# Altium PCB PCB.PcbDoc
Units mm, origin at the board's own origin, x right, y up, seen from the top; angles counter-clockwise.
Board outline 38.61 x 38.61 mm, 4 copper layers (Top Layer, Signal Layer 1, Signal Layer 2, Bottom Layer), stack 1.54 mm thick; 19 components, 86 nets, 246 pads, 116 vias.
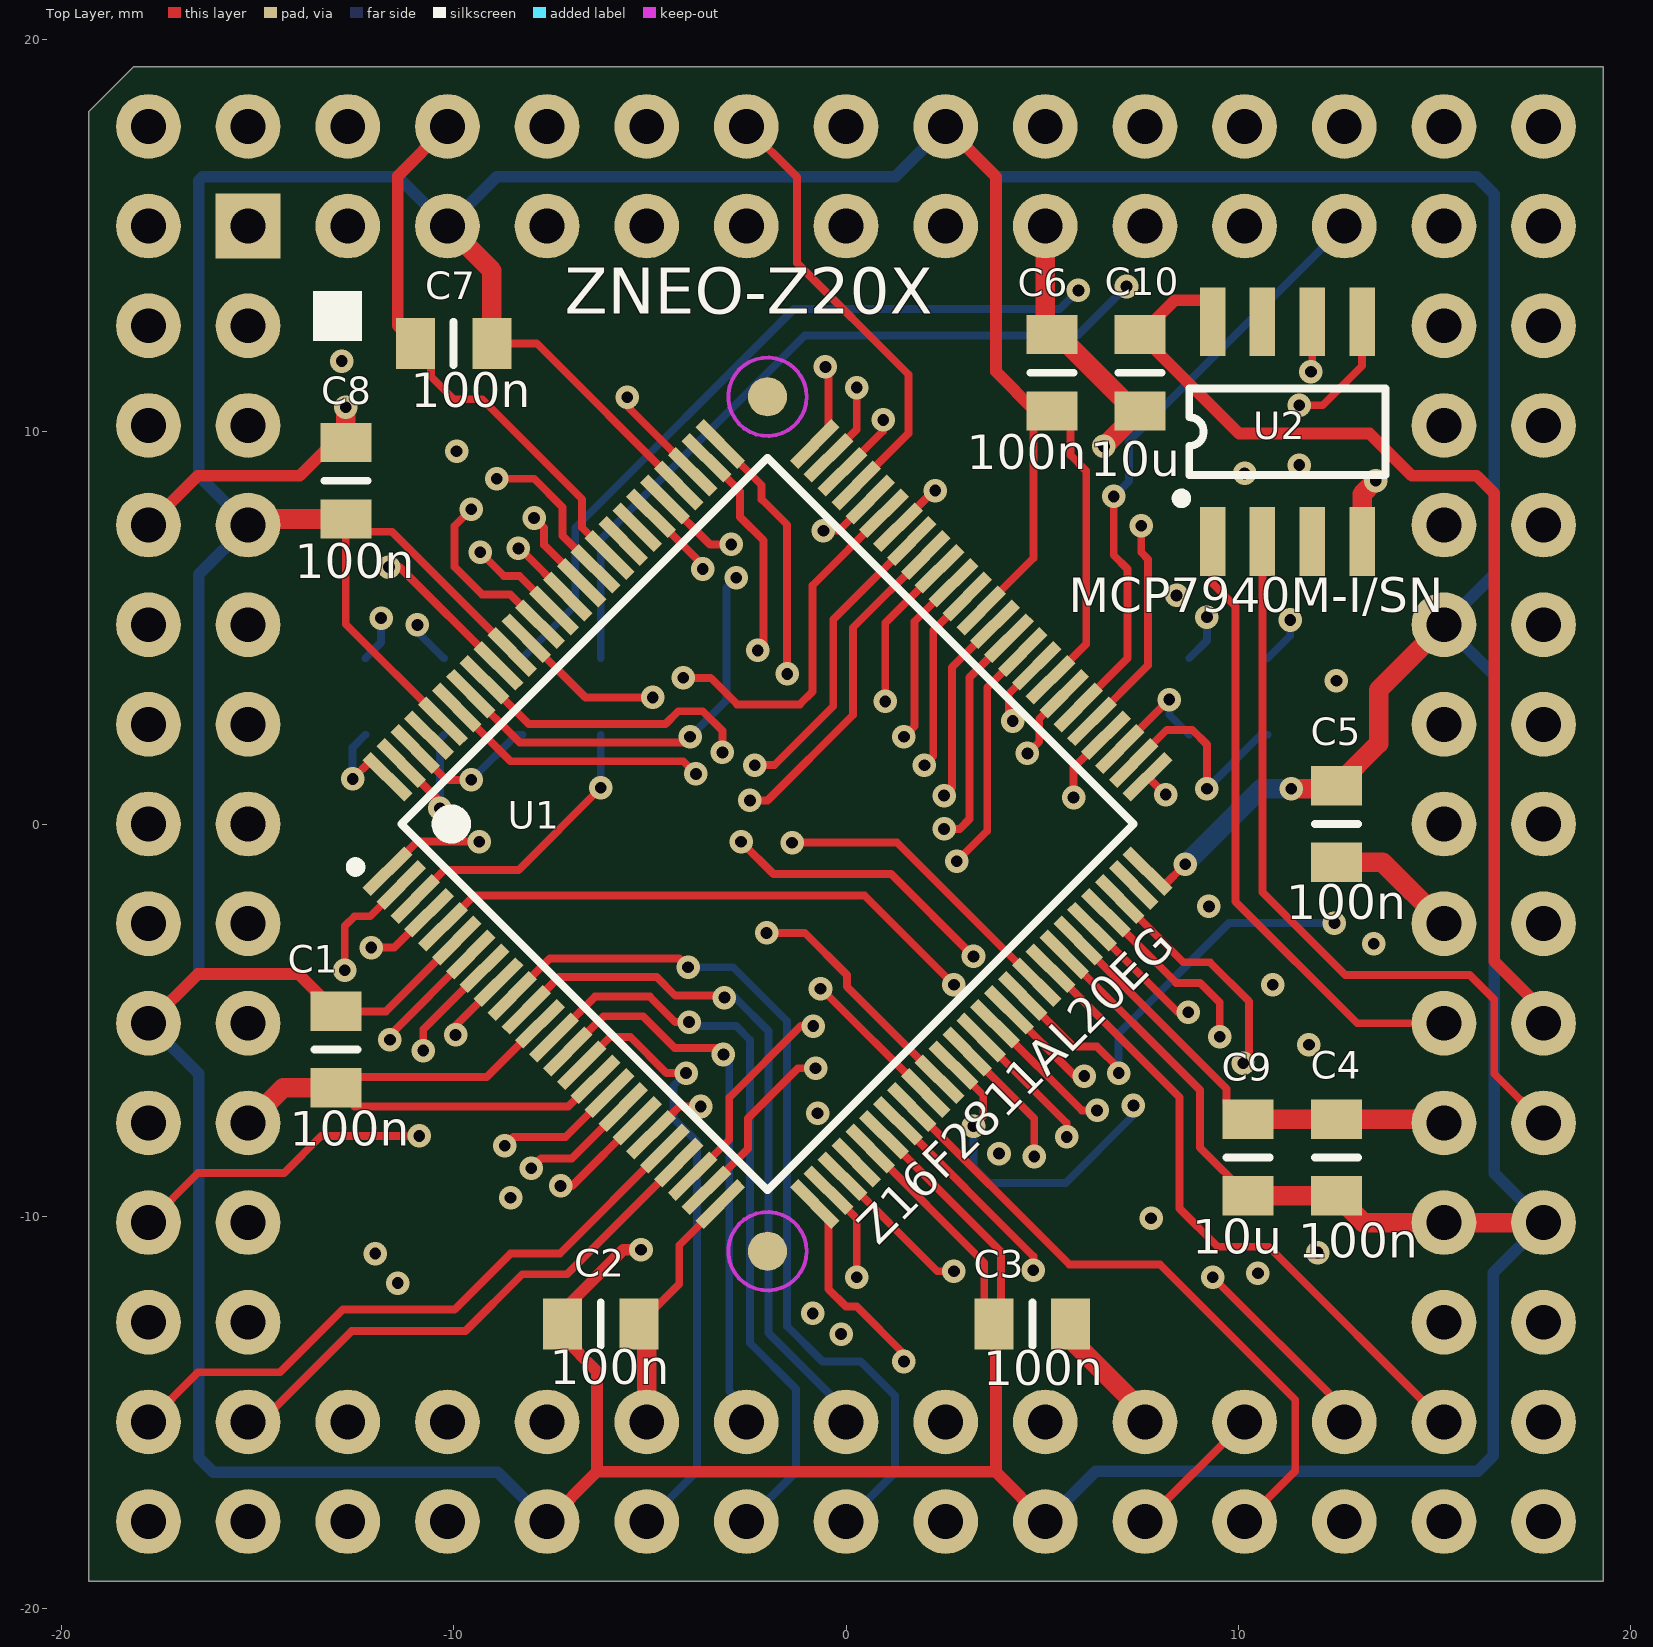
[diagram p0: Top Layer view]
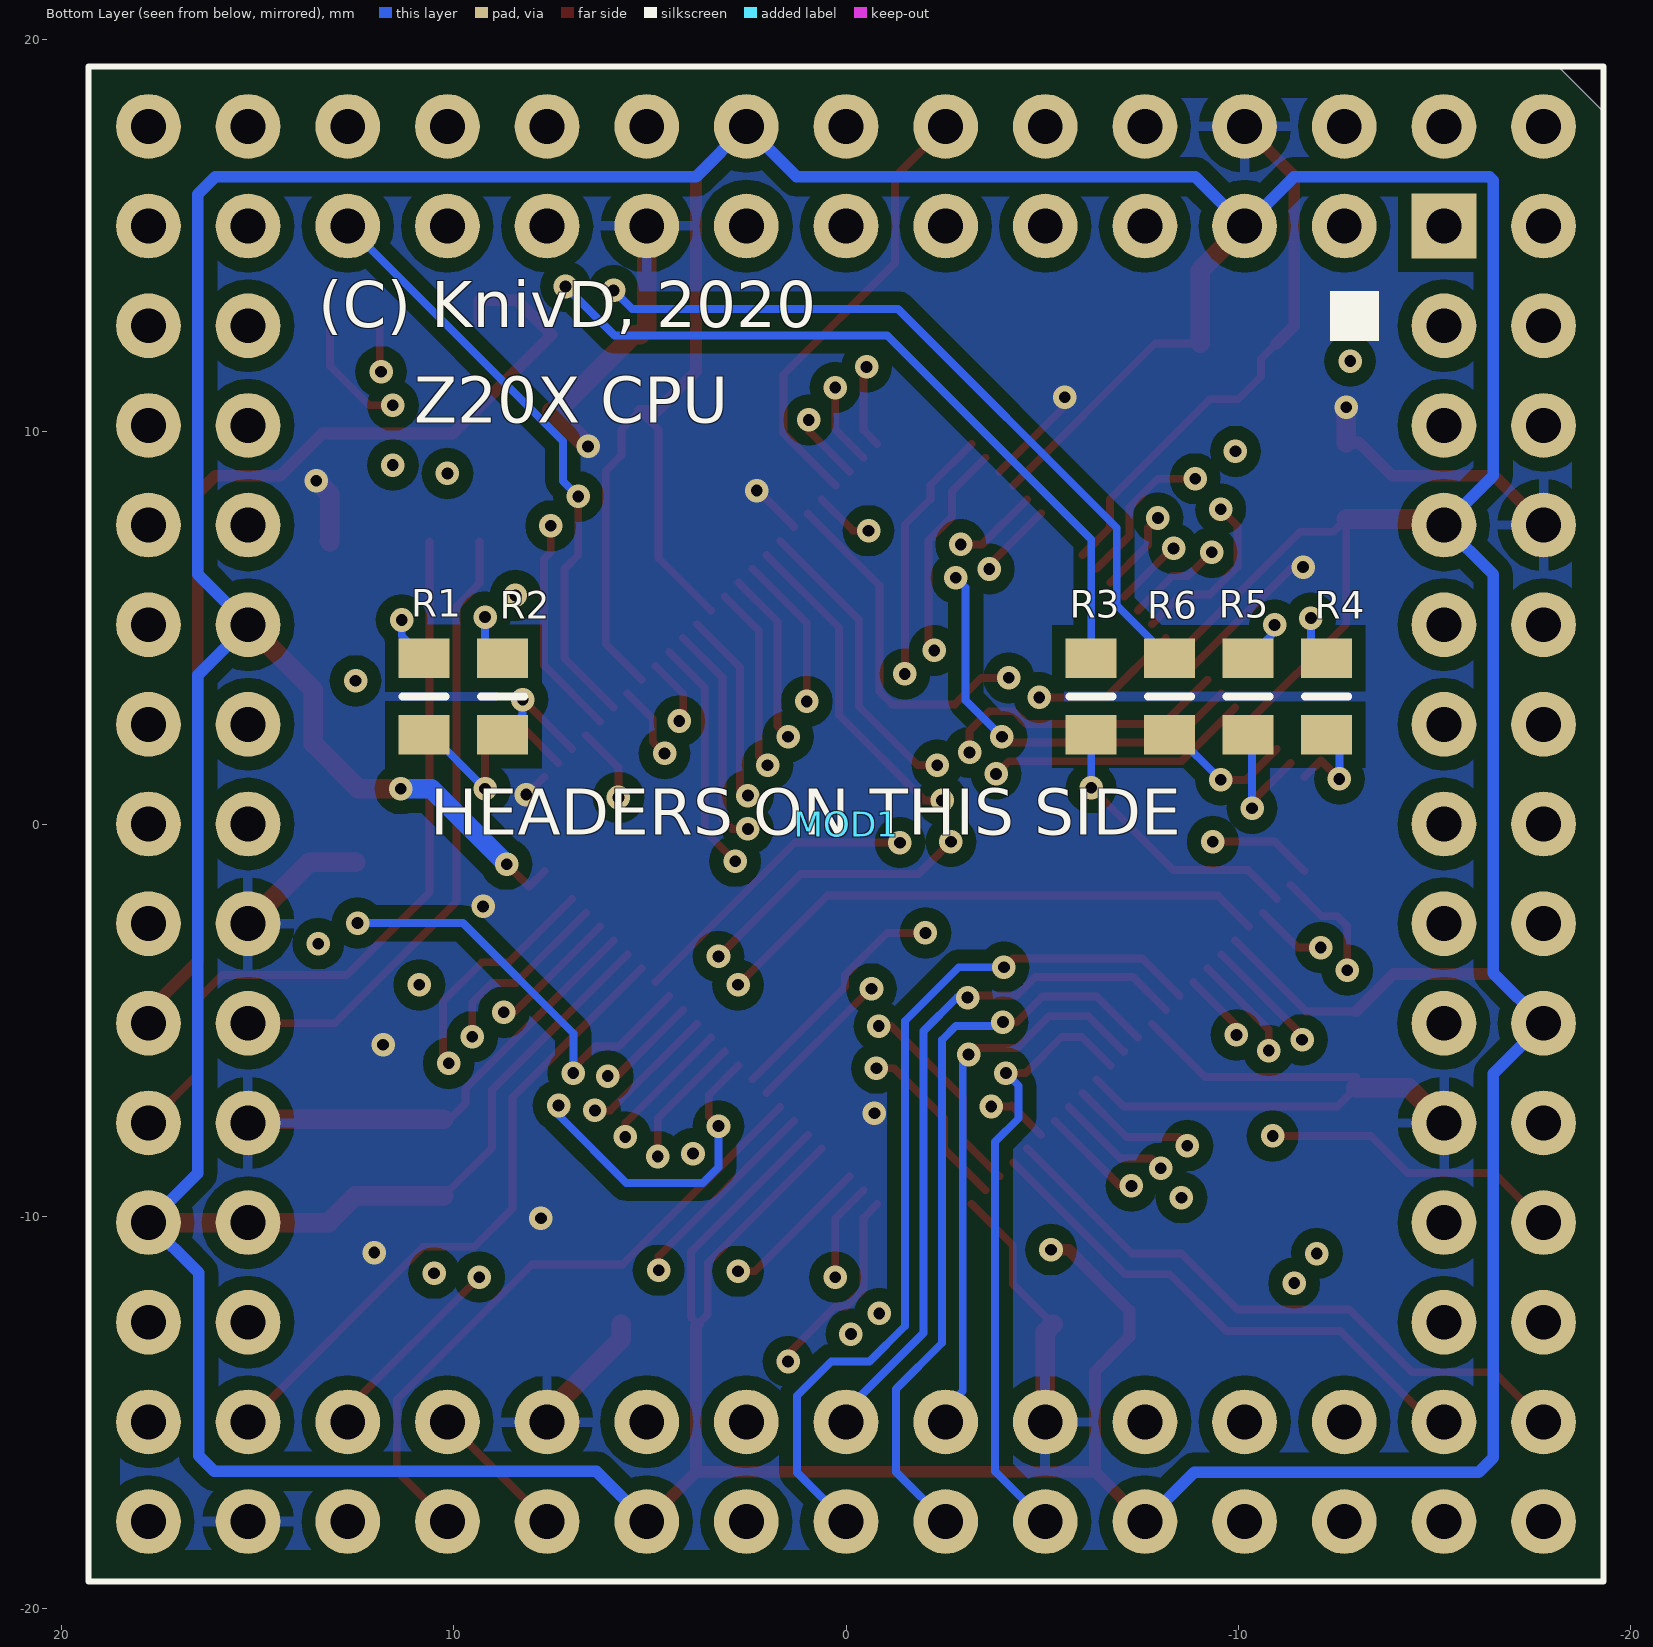
[diagram p1: Bottom Layer view, seen from below]
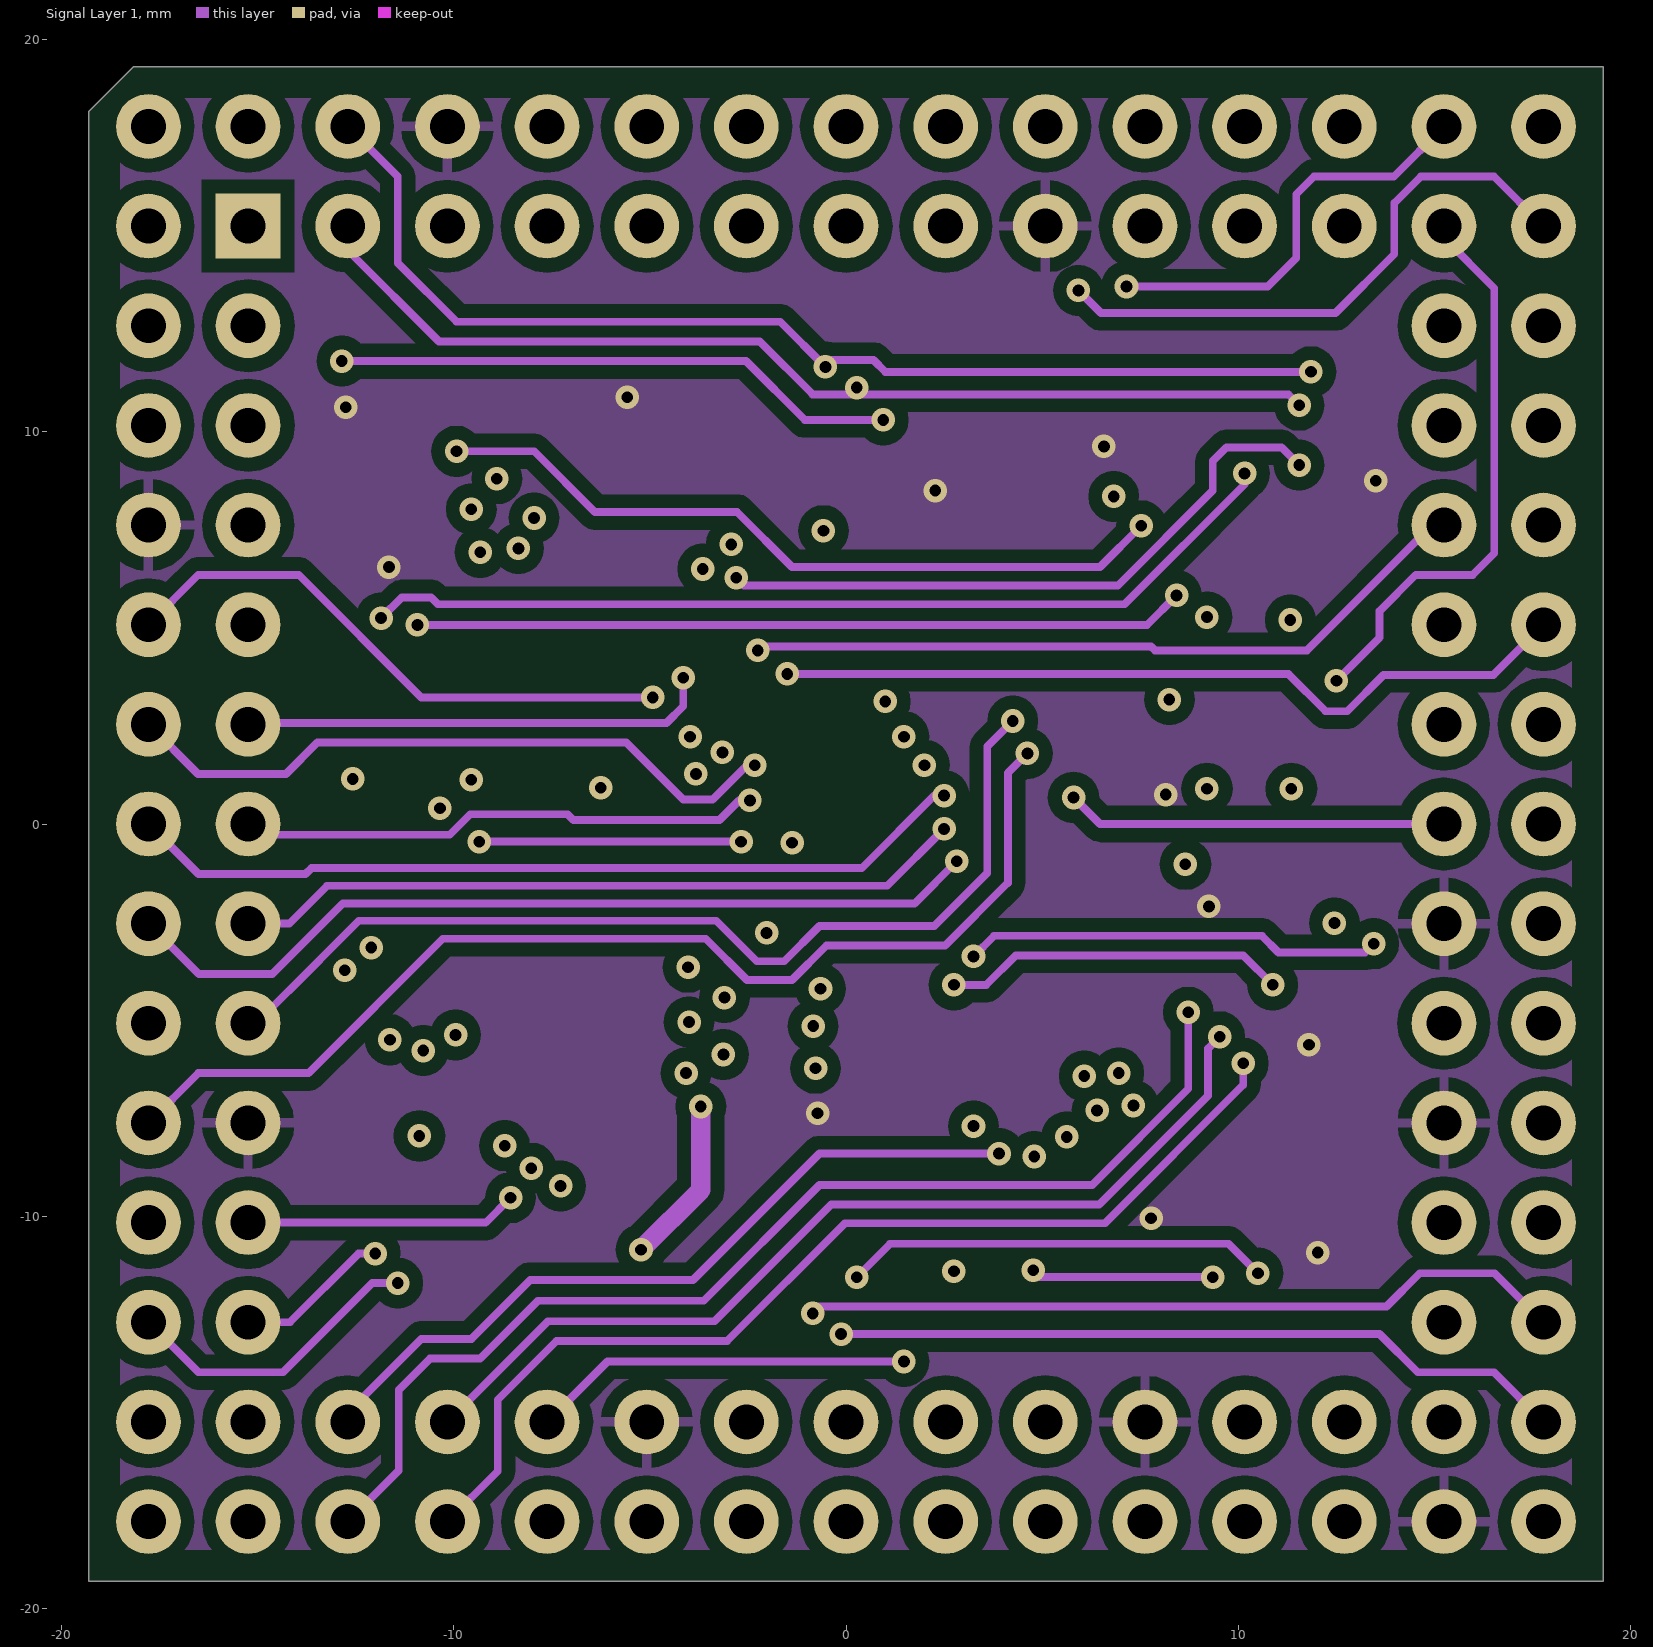
[diagram p2: Signal Layer 1]
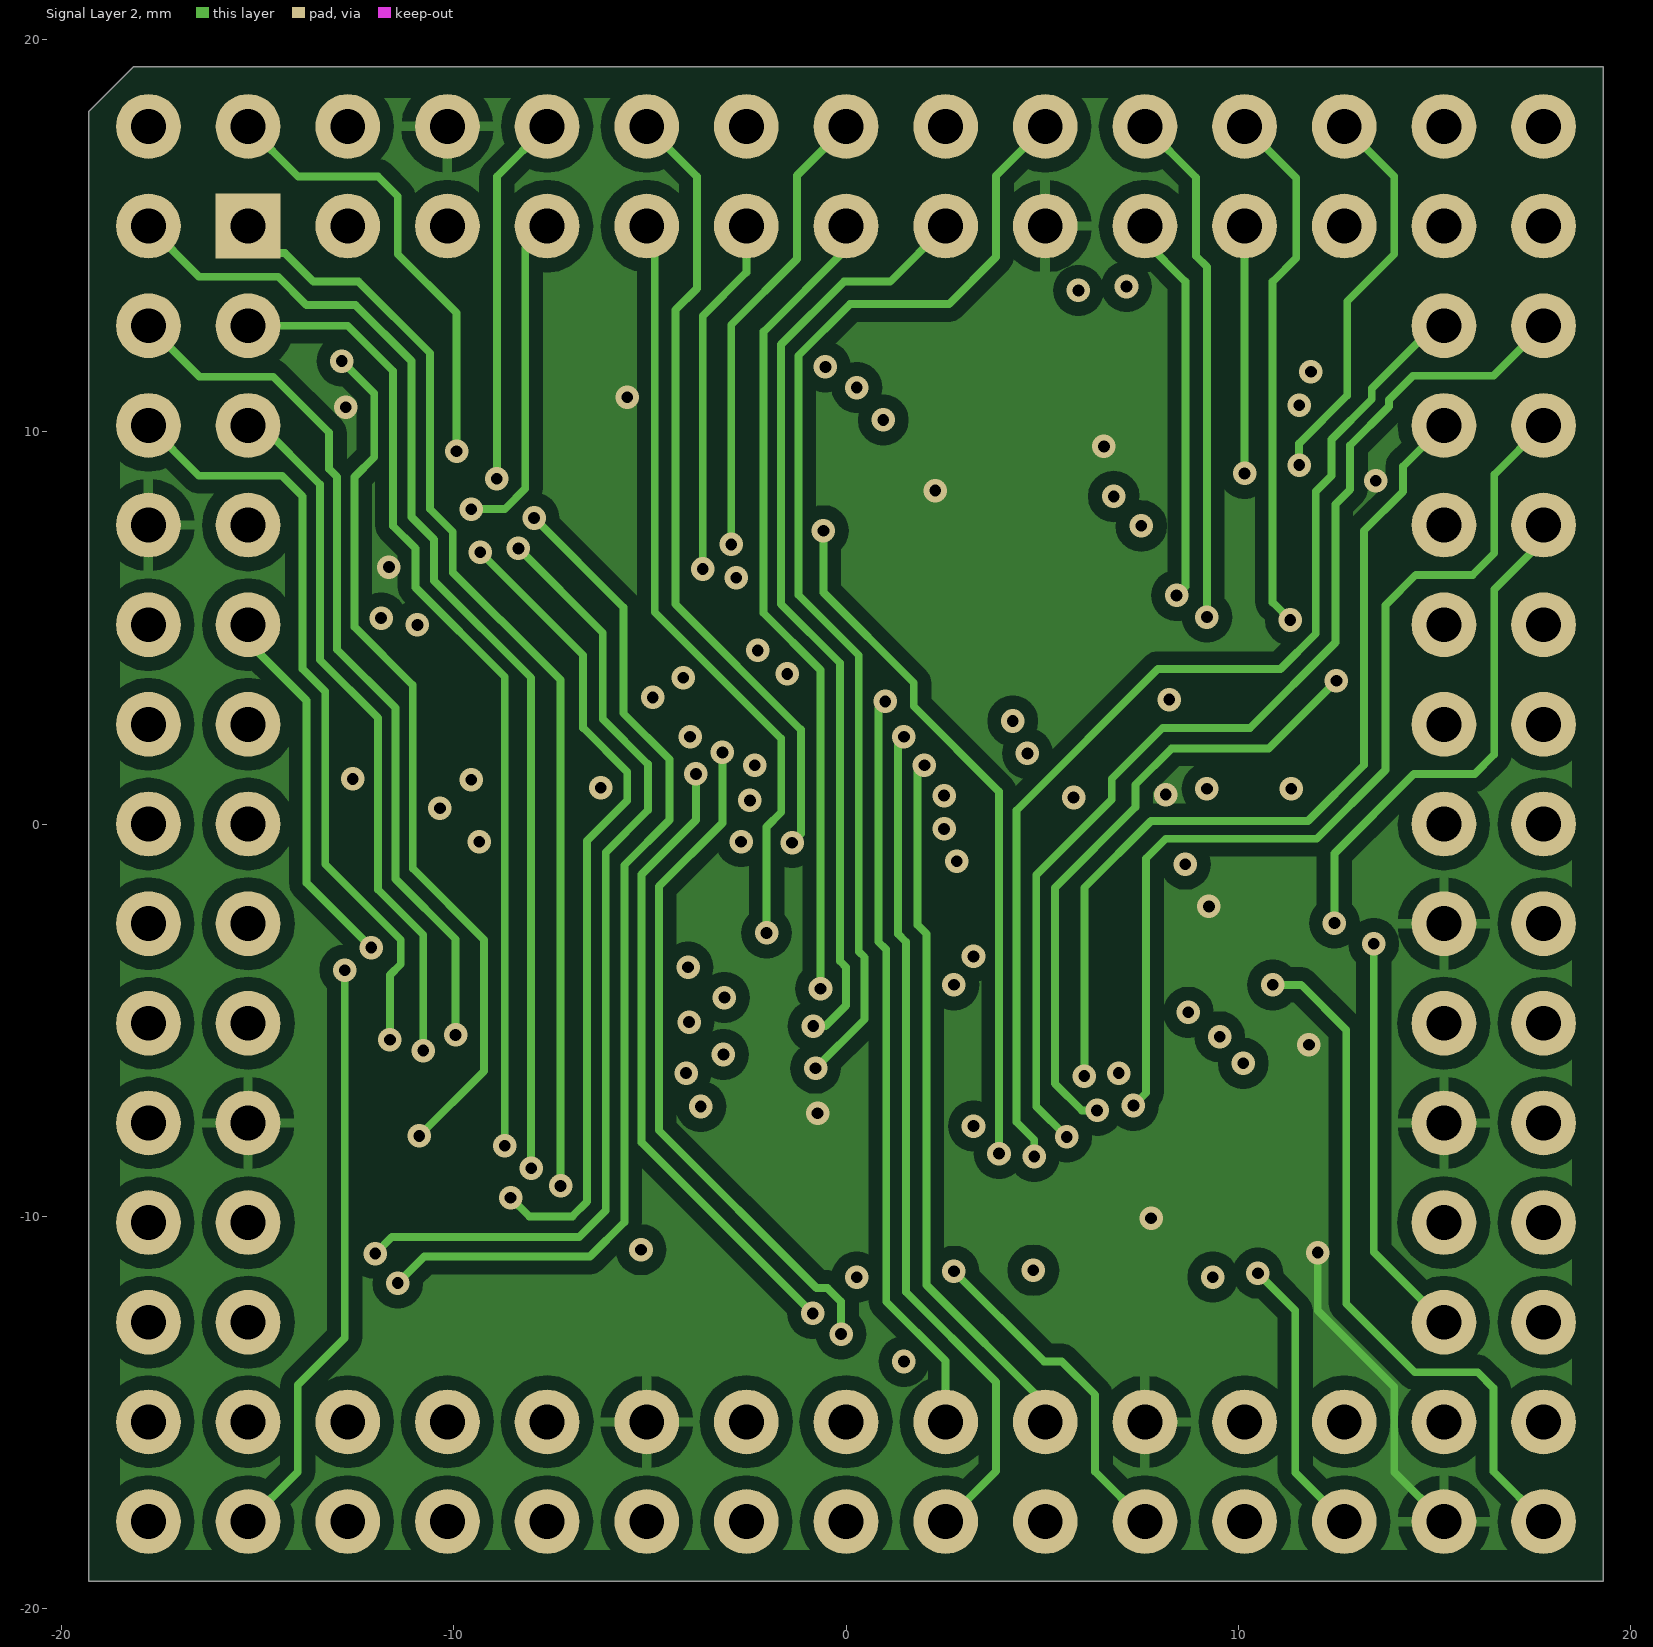
[diagram p3: Signal Layer 2]
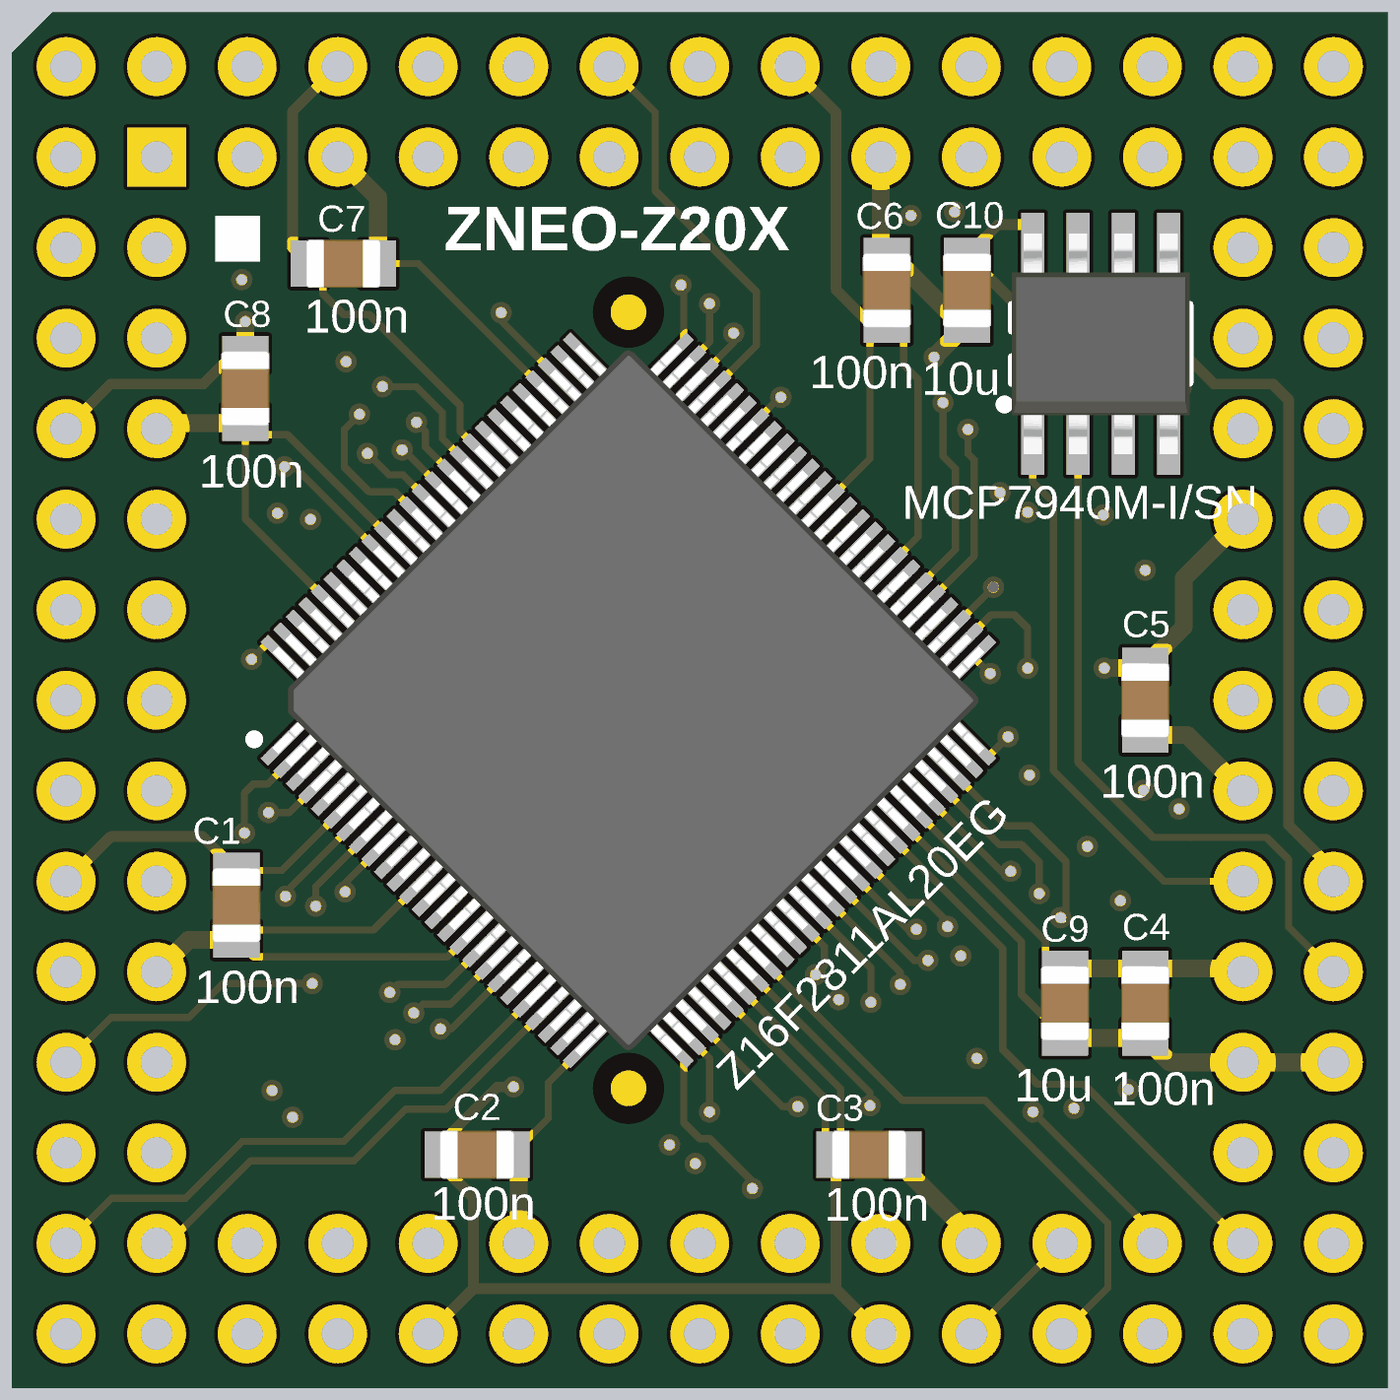
[diagram p4: 3D render of the assembled board from above, using the file's embedded part models]
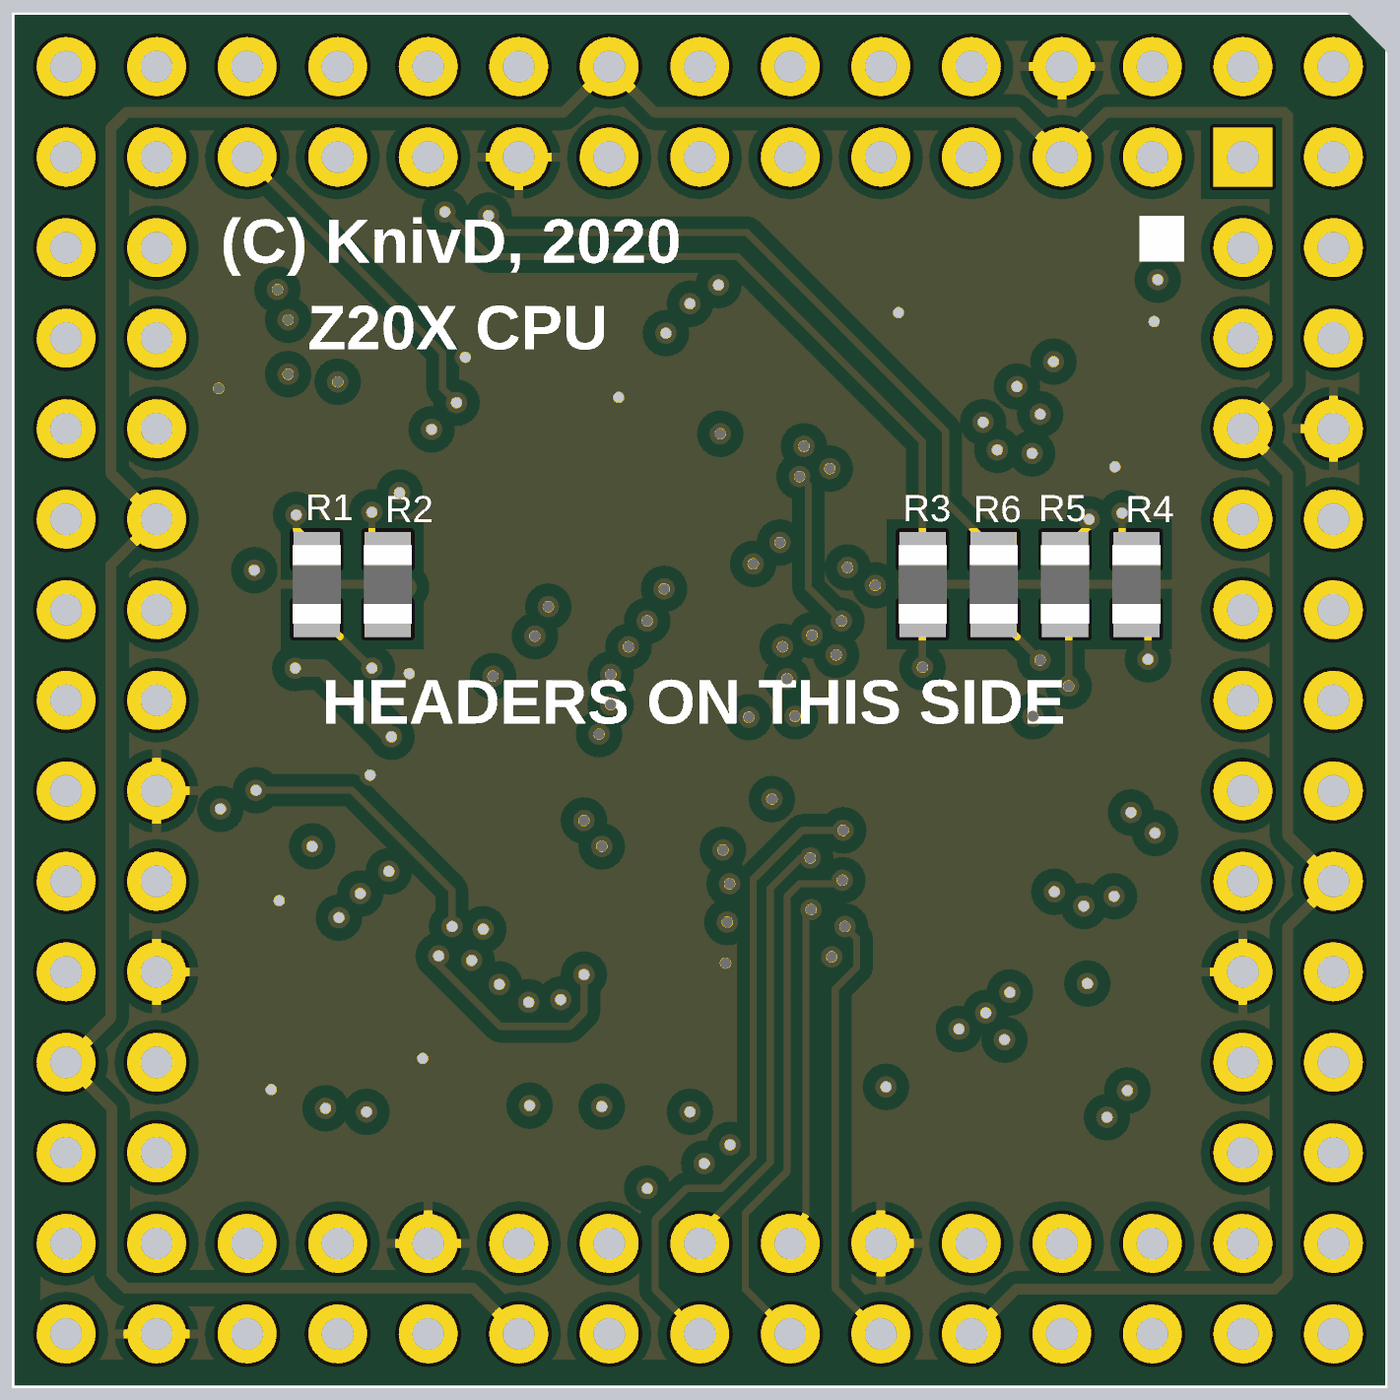
[diagram p5: 3D render of the assembled board from below, using the file's embedded part models]

## Layer stack, top to bottom
Top Solder: solder mask 0.0102, Solder Resist, Dk 3.5
Top Layer: signal copper 0.0356
Dielectric 1: core 0.508, FR-4, Dk 4.2
Signal Layer 1: signal copper 0.036
Dielectric 3: prepreg 0.381, Dk 4.2
Signal Layer 2: signal copper 0.036
Dielectric 2: core 0.508, Dk 4.2
Bottom Layer: signal copper 0.0356
Solder Side: solder mask 0.0102, Solder Resist, Dk 3.5

## Board outline
-19.304,-19.304 -19.304,18.161 -18.161,19.304 19.304,19.304 19.304,-19.304

## Design rules (kind name [scope] priority, off if disabled: settings)
Clearance Clearance_Poly [(IsRegion)] p1: gap=0.35 ignorepadtopadclearanceinfootprint=TRUE
Clearance [All] p2: gap=0.24 ignorepadtopadclearanceinfootprint=TRUE
DiffPairsRouting [All] p1: maxlimit=1 minlimit=0.15 mostfreqgap=0.2 toplayer_minwidth=0.2 toplayer_maxwidth=1 toplayer_prefwidth=0.2 midlayer1_minwidth=0.2 midlayer1_maxwidth=1 midlayer1_prefwidth=0.2 midlayer2_minwidth=0.2 midlayer2_maxwidth=1 midlayer2_prefwidth=0.2 bottomlayer_minwidth=0.2 bottomlayer_maxwidth=1 bottomlayer_prefwidth=0.2 maxuncoupledlength=12.7
HoleSize [All] p1 off: absolutevalues=TRUE maxlimit=2.5 minlimit=0.025 maxpercent=80.000 minpercent=20.000
HoleToHoleClearance [All] p1 off: gap=0 allowstackedmicrovias=TRUE
LayerPairs [All] p1 off: enforce=TRUE
MaxMinImpedance [InNet('ANT50R')] p1: minimum=49.90 maximum=50.10
MinimumSolderMaskSliver [All] p1 off: minsoldermaskwidth=-50
NetAntennae [All] p1 off: netantennaetolerance=0
PlaneClearance [All] p1: clearance=0.5
PlaneConnect [All] p1: planeconnectstyle=Direct reliefexpansion=0.5 reliefentries=4 reliefconductorwidth=0.35 reliefairgap=0.35
PolygonConnect [All] p1: thpad.connectstyle=Relief thpad.reliefconductorwidth=0.25 thpad.reliefentries=4 thpad.polygonreliefangle="90 Angle" thpad.airgapwidth=0.35 smdpad.connectstyle=Relief smdpad.reliefconductorwidth=0.25 smdpad.reliefentries=4 smdpad.polygonreliefangle="90 Angle" smdpad.airgapwidth=0.35 via.connectstyle=Direct via.reliefconductorwidth=0.35 via.reliefentries=4 via.polygonreliefangle="90 Angle" via.airgapwidth=0.35
RoutingCorners [All] p1: cornerstyle=45-Degree minsetback=2 maxsetback=2
RoutingVias [All] p1: holewidth=0.3 width=0.6 viastyle="Through Hole" minholewidth=0.3 minwidth=0.6 maxholewidth=1 maxwidth=2
SilkToBoardRegionClearance [All] p1 off:
SilkToSilkClearance [All] p1 off: silktosilkclearance=-50
SilkToSolderMaskClearance [IsPad] p1 off: minsilkscreentomaskgap=-50 clearancetoexposedcopper=TRUE
SolderMaskExpansion [All] p1: expansion=0.102
Width [All] p1: maxlimit=0.5 minlimit=0.2 preferedwidth=0.2
18 further rules are at their usual default settings.

## Components (designator, comment, footprint, x,y, rotation, side; value= is the part's Value field where it differs from the comment)
C1 "100n" _0805_CAP -13,-5.75 r270 top locked
C2 "100n" _0805_CAP -6.25,-12.75 r180 top locked
C3 "100n" _0805_CAP 4.75,-12.75 r0 top locked
C4 "100n" _0805_CAP 12.5,-8.5 r270 top locked
C5 "100n" _0805_CAP 12.5,0 r270 top locked
C6 "100n" _0805_CAP 5.25,11.5 r90 top locked
C7 "100n" _0805_CAP -10,12.25 r180 top locked
C8 "100n" _0805_CAP -12.75,8.75 r90 top locked
C9 "10u" _0805_CAP 10.25,-8.5 r90 top locked
C10 "10u" _0805_CAP 7.5,11.5 r90 top locked
MOD1 "Z20X CPU Module" PGA100X15 0,0 r0 bottom locked
R1 "10k" _0805_RES 10.75,3.25 r90 bottom locked
R2 "10k" _0805_RES 8.75,3.25 r90 bottom locked
R3 "10k" _0805_RES -6.25,3.25 r90 bottom locked
R4 "10k" _0805_RES -12.25,3.25 r270 bottom locked
R5 "10k" _0805_RES -10.25,3.25 r270 bottom locked
R6 "10k" _0805_RES -8.25,3.25 r270 bottom locked
U1 "Z16F2811AL20EG" QFP50P1600X1600X170-100N -2,0 r45 top locked
U2 "MCP7940M-I/SN" SOIC8 11.25,10 r0 top locked

## Footprints (in the part's own frame and the unit in brackets; to place one, negate y for a bottom-side part, rotate by r counter-clockwise, add the part's x,y. Pads: shape width x height; smd on the part's side, far side on the other; paste and mask are expansions set on the pad)
_0805_CAP [mm]
  rect 1x1.3 smd: 1(-0.975,0) 2(0.975,0)
  silkscreen extent 0,-0.55 0,0.55, body extent -1.05,-0.67 1.05,0.68, height 1.1
_0805_RES [mm]
  rect 1x1.3 smd: 1(-0.975,0) 2(0.975,0)
  silkscreen extent 0,-0.55 0,0.55, body extent -1.1,-0.67 1.1,0.67, height 0.6
PGA100X15 [mil] "PGA module, 100 pins, 2.54 pitch"
  rect 65x65 hole 35: 1(-600,-600)
  round 65 hole 35: 2(-700,-600) 3(-600,-500) 4(-700,-500) 5(-600,-400) 6(-700,-400) 7(-600,-300) 8(-700,-300) 9(-600,-200) 10(-700,-200) 11(-600,-100) 12(-700,-100) 13(-600,0) 14(-700,0) 15(-600,100) 16(-700,100) 17(-600,200) 18(-700,200) 19(-600,300) 20(-700,300) 21(-600,400) 22(-700,400) 23(-600,500) 24(-700,500) 25(-600,600) 26(-700,600) 27(-600,700) 28(-500,600) 29(-500,700) 30(-400,600) 31(-400,700) 32(-300,600) 33(-300,700) 34(-200,600) 35(-200,700) 36(-100,600) 37(-100,700) 38(0,600) 39(0,700) 40(100,600) 41(100,700) 42(200,600) 43(200,700) 44(300,600) 45(300,700) 46(400,600) 47(400,700) 48(500,600) 49(500,700) 50(600,600) 51(600,700) 52(700,600) 53(600,500) 54(700,500) 55(600,400) 56(700,400) 57(600,300) 58(700,300) 59(600,200) 60(700,200) 61(600,100) 62(700,100) 63(600,0) 64(700,0) 65(600,-100) 66(700,-100) 67(600,-200) 68(700,-200) 69(600,-300) 70(700,-300) 71(600,-400) 72(700,-400) 73(600,-500) 74(700,-500) 75(600,-600) 76(700,-600) 77(600,-700) 78(500,-600) 79(500,-700) 80(400,-600) 81(400,-700) 82(300,-600) 83(300,-700) 84(200,-600) 85(200,-700) 86(100,-600) 87(100,-700) 88(0,-600) 89(0,-700) 90(-100,-600) 91(-100,-700) 92(-200,-600) 93(-200,-700) 94(-300,-600) 95(-300,-700) 96(-400,-600) 97(-400,-700) 98(-500,-600) 99(-500,-700) 100(-600,-700) 101(-700,-700) 102(-700,700) 103(700,700) 104(700,-700)
  silkscreen extent -760,-760 760,760
QFP50P1600X1600X170-100N [mm] "QFP, 0.50mm Pitch, Square; 100 Pin,14.00mm L X 14.00mm W X 1.70mm H Body, IPC Medium Density"
  round 1 smd paste-0.51 mask+0.5: 0(-7.7,-7.7) 0(7.7,7.7)
  rect 1.5x0.3 smd: 1(-7.7,6) 2(-7.7,5.5) 3(-7.7,5) 4(-7.7,4.5) 5(-7.7,4) 6(-7.7,3.5) 7(-7.7,3) 8(-7.7,2.5) 9(-7.7,2) 10(-7.7,1.5) 11(-7.7,1) 12(-7.7,0.5) 13(-7.7,0) 14(-7.7,-0.5) 15(-7.7,-1) 16(-7.7,-1.5) 17(-7.7,-2) 18(-7.7,-2.5) 19(-7.7,-3) 20(-7.7,-3.5) 21(-7.7,-4) 22(-7.7,-4.5) 23(-7.7,-5) 24(-7.7,-5.5) 25(-7.7,-6) 51(7.7,-6) 52(7.7,-5.5) 53(7.7,-5) 54(7.7,-4.5) 55(7.7,-4) 56(7.7,-3.5) 57(7.7,-3) 58(7.7,-2.5) 59(7.7,-2) 60(7.7,-1.5) 61(7.7,-1) 62(7.7,-0.5) 63(7.7,0) 64(7.7,0.5) 65(7.7,1) 66(7.7,1.5) 67(7.7,2) 68(7.7,2.5) 69(7.7,3) 70(7.7,3.5) 71(7.7,4) 72(7.7,4.5) 73(7.7,5) 74(7.7,5.5) 75(7.7,6)
  rect 0.3x1.5 smd: 26(-6,-7.7) 27(-5.5,-7.7) 28(-5,-7.7) 29(-4.5,-7.7) 30(-4,-7.7) 31(-3.5,-7.7) 32(-3,-7.7) 33(-2.5,-7.7) 34(-2,-7.7) 35(-1.5,-7.7) 36(-1,-7.7) 37(-0.5,-7.7) 38(0,-7.7) 39(0.5,-7.7) 40(1,-7.7) 41(1.5,-7.7) 42(2,-7.7) 43(2.5,-7.7) 44(3,-7.7) 45(3.5,-7.7) 46(4,-7.7) 47(4.5,-7.7) 48(5,-7.7) 49(5.5,-7.7) 50(6,-7.7) 76(6,7.7) 77(5.5,7.7) 78(5,7.7) 79(4.5,7.7) 80(4,7.7) 81(3.5,7.7) 82(3,7.7) 83(2.5,7.7) 84(2,7.7) 85(1.5,7.7) 86(1,7.7) 87(0.5,7.7) 88(0,7.7) 89(-0.5,7.7) 90(-1,7.7) 91(-1.5,7.7) 92(-2,7.7) 93(-2.5,7.7) 94(-3,7.7) 95(-3.5,7.7) 96(-4,7.7) 97(-4.5,7.7) 98(-5,7.7) 99(-5.5,7.7) 100(-6,7.7)
  Top Layer keep-out circle w0.1: c-7.7,-7.7 r1
  Top Layer keep-out circle w0.1: c7.7,7.7 r1
  silkscreen extent -8.32,-6.6 6.6,6.77, body extent -8.01,-8.01 8.01,8.01, height 1.7
SOIC8 [mm] "SOIC8 Package"
  rect 0.65x1.75 smd: 1(-1.905,-2.8) 2(-0.635,-2.8) 3(0.635,-2.8) 4(1.905,-2.8) 5(1.905,2.8) 6(0.635,2.8) 7(-0.635,2.8) 8(-1.905,2.8)
  silkscreen extent -2.82,-1.82 2.5,1.1, body extent -2.5,-3.1 2.5,3.1, height 1.75

## Part data
C1 C2 C3 C4 C5 C6 C7 C8 C9 C10: library part Capacitor, "Capacitor"
R1 R2 R3 R4 R5 R6: library part Resistor, "Resistor"
U1: library part "Z16F (QFP100)", "16-bit microcontroller/microprocessor", Manufacturer=Zilog
U2: library part MCP7940M, "Low-Cost I2C™ Real-Time Clock/Calendar with SRAM", Manufacturer=Microchip

## Via types
v1: diameter 0.6, hole 0.3, Top Layer to Bottom Layer, tented both sides, 116 vias

## Nets (pads, with @x,y where several pads share a name; then routed paths per layer and width w, separated by ;. In a path a pad name is that pad's centre, name@x,y a point inside that pad or via, vN(x,y) a via of type N, cw(c..) or ccw(c..) an arc to the next point about the centre after c; other vN are vias at no path point)
+3V3: C1.1 C2.2 C3.1 C4.2 C5.1 C6.1 C7.1 C8.1 C9.1 MOD1.7 MOD1.18 MOD1.33 MOD1.43 MOD1.55 MOD1.56 MOD1.67 MOD1.87 MOD1.96 U1.6 U1.20 U1.30 U1.31 U1.44 U1.50 U1.58 U1.63 U1.79 U1.91 U1.96 | length 251.3
  Top Layer w0.2: C1.1 -11.725,-4.775 U1.6 ; U1.96 -12.75,5.093 C8.1 -12.425,7.45 -11.571,7.45 U1.91 ; C7.1 -7.886,12.25 U1.79 ; U1.20 -4.225,-7.175 -4.2,-7.2 v1(-3.7,-7.2) ; U1.30 3.525,-11.182 3.525,-12.5 C3.1 3.95,-12.575 3.95,-10.9 U1.31 ; U1.63 4.775,6.775 4.775,10.05 C6.1 5.725,10.05 5.725,9.4 6.125,9 6.125,4.589 U1.58 ; U1.44 9.025,-6.782 9.025,-8.25 C9.1 ; U1.50 8.08,-1.595 v1(8.65,-1.025)
  Top Layer w0.3: MOD1.18 -16.525,-3.825 -13.95,-3.825 C1.1 ; MOD1.33 -6.35,-16.51 ; v1(-5.225,-10.85) -5.675,-10.85 -7.225,-12.4 C2.2 -7.225,-13.075 -6.35,-13.95 -6.35,-16.51 ; MOD1.87 3.825,16.495 3.825,11.525 4.825,10.525 C6.1 ; C3.1 3.825,-12.8 3.825,-16.525 ; MOD1.43 3.825,-16.525 ; -6.35,-16.51 3.81,-16.51 3.825,-16.525
  Top Layer w0.5: MOD1.7 -15.085,7.775 C8.1 ; MOD1.96 -9.025,14.105 C7.1 ; C9.1 C4.2 13.185,-10.16 MOD1.56 ; v1(11.35,0.9) 12.425,0.9 C5.1 13.575,2.05 13.575,3.415 MOD1.67
  Signal Layer 1 w0.5: v1(-5.225,-10.85) -3.7,-9.325 v1(-3.7,-7.2)
  Bottom Layer w0.3: MOD1.33 -8.875,-16.525 -16.125,-16.525 -16.5,-16.15 -16.5,-6.36 MOD1.18 -16.5,-3.8 -16.5,6.36 MOD1.7 -16.5,8.88 -16.5,16.4 -16.4,16.5 -11.42,16.5 MOD1.96 -8.9,16.5 1.26,16.5 MOD1.87 3.82,16.5 16.075,16.5 16.525,16.05 16.525,6.365 MOD1.67 16.525,3.795 16.525,-8.905 MOD1.56 16.5,-11.44 16.5,-16.1 16.1,-16.5 6.36,-16.5 MOD1.43
  Bottom Layer w0.5: v1(8.65,-1.025) 10.575,0.9 v1(11.35,0.9)
A0: MOD1.1 U1.19 | length 31.2
  Top Layer w0.2: v1(-7.275,-9.225) -6.982,-9.225 U1.19
  Signal Layer 2 w0.2: MOD1.1 -14.55,14.55 -14.3,14.55 -13.575,13.825 -12.425,13.825 -10.6,12 -10.6,8.025 -10.025,7.45 -10.025,6.413 -8.812,5.2 -8.8,5.2 -7.275,3.675 v1(-7.275,-9.225)
A1: MOD1.2 U1.18 | length 33
  Top Layer w0.2: v1(-8.025,-8.775) -7.775,-8.525 -6.99,-8.525 U1.18
  Signal Layer 2 w0.2: MOD1.2 -16.49,13.95 -14.475,13.95 -13.75,13.225 -12.5,13.225 -11.075,11.8 -11.075,7.825 -10.5,7.25 -10.5,6.2 -8.025,3.725 v1(-8.025,-8.775)
A2: MOD1.3 U1.17 | length 28.3
  Top Layer w0.2: v1(-8.7,-8.2) -8.475,-7.975 -7.147,-7.975 U1.17
  Signal Layer 2 w0.2: MOD1.3 -12.7,12.7 -11.55,11.55 -11.55,7.6 -10.975,7.025 -10.975,6.03 -8.7,3.755 v1(-8.7,-8.2)
A3: MOD1.4 U1.9 | length 24.2
  Top Layer w0.2: v1(-9.95,-5.375) -9.95,-5.136 -8.859,-4.045 U1.9
  Signal Layer 2 w0.2: MOD1.4 -16.48,11.4 -14.6,11.4 -13.175,9.975 -13.175,9.047 -12.97,8.842 -12.97,4.445 -11.485,2.96 -11.485,-1.404 -9.95,-2.939 v1(-9.95,-5.375)
A4: MOD1.5 U1.8 | length 20.7
  Top Layer w0.2: v1(-10.775,-5.775) -10.775,-5.239 U1.8
  Signal Layer 2 w0.2: MOD1.5 -14.91,10.16 -13.41,8.66 -13.41,4.185 -11.925,2.7 -11.925,-1.675 -10.775,-2.825 v1(-10.775,-5.775)
A5: MOD1.6 U1.7 | length 22.7
  Top Layer w0.2: v1(-11.625,-5.5) -11.625,-5.382 U1.7
  Signal Layer 2 w0.2: MOD1.6 -16.495,8.875 -14.375,8.875 -13.85,8.35 -13.85,3.95 -13.275,3.375 -13.275,-1.025 -11.35,-2.95 -11.35,-3.575 -11.625,-3.85 v1(-11.625,-5.5)
A6: MOD1.9 U1.4 | length 11.4
  Top Layer w0.2: v1(-12.101,-3.15) -11.514,-3.15 U1.4
  Signal Layer 2 w0.2: MOD1.9 -15.24,4.64 -13.75,3.15 -13.75,-1.501 v1(-12.101,-3.15)
A7: MOD1.10 U1.90 | length 18.5
  Top Layer w0.2: U1.90 -6.639,3.225 v1(-4.925,3.225)
  Signal Layer 1 w0.2: MOD1.10 -16.51,6.35 -13.95,6.35 -10.825,3.225 v1(-4.925,3.225)
A8: MOD1.11 U1.70 | length 21
  Top Layer w0.2: v1(-4.15,3.725) -3.45,3.725 -2.775,3.05 -1.175,3.05 -0.85,3.375 -0.85,6.086 0.97,7.905 U1.70
  Signal Layer 1 w0.2: MOD1.11 -15.205,2.575 -4.575,2.575 -4.15,3 v1(-4.15,3.725)
A9: MOD1.12 U1.68 | length 24.9
  Top Layer w0.2: v1(-2.325,1.5) -1.825,1.5 -0.325,3 -0.325,5.211 U1.68
  Signal Layer 1 w0.2: MOD1.12 -16.515,1.275 -14.275,1.275 -13.475,2.075 -5.6,2.075 -4.15,0.625 -3.4,0.625 -2.525,1.5 v1(-2.325,1.5)
A10: MOD1.13 U1.67 | length 21.8
  Top Layer w0.2: v1(-2.45,0.6) -2,0.6 0.175,2.775 0.175,5.003 U1.67
  Signal Layer 1 w0.2: MOD1.13 -14.965,-0.275 -10.1,-0.275 -9.575,0.25 -7.1,0.25 -6.95,0.1 -3.225,0.1 -2.725,0.6 v1(-2.45,0.6)
A11: MOD1.14 U1.62 | length 26.5
  Top Layer w0.2: v1(2.5,0.725) 2.7,0.925 2.7,3.993 U1.62
  Signal Layer 1 w0.2: MOD1.14 -16.505,-1.275 -13.775,-1.275 -13.625,-1.125 0.4,-1.125 2.25,0.725 v1(2.5,0.725)
A12: MOD1.15 U1.61 | length 24.5
  Top Layer w0.2: v1(2.5,-0.125) 2.9,-0.125 3.15,0.125 3.15,3.736 U1.61
  Signal Layer 1 w0.2: MOD1.15 -14.19,-2.54 -13.225,-1.575 1.05,-1.575 v1(2.5,-0.125)
A13: MOD1.16 U1.60 | length 28.4
  Top Layer w0.2: v1(2.825,-0.95) 3.6,-0.175 3.6,3.479 U1.60
  Signal Layer 1 w0.2: MOD1.16 -16.495,-3.825 -14.625,-3.825 -12.825,-2.025 1.75,-2.025 v1(2.825,-0.95)
A14: MOD1.17 U1.59 | length 27.2
  Top Layer w0.2: v1(4.25,2.625) 4.15,2.725 4.15,3.322 U1.59
  Signal Layer 1 w0.2: MOD1.17 -15.03,-5.08 -13.415,-3.465 -13.415,-3.46 -12.42,-2.465 -3.31,-2.465 -2.275,-3.5 -1.575,-3.5 -0.675,-2.6 2.25,-2.6 3.6,-1.25 3.6,1.975 v1(4.25,2.625)
A15: MOD1.20 U1.57 | length 30.7
  Top Layer w0.2: v1(4.625,1.8) 4.925,2.1 4.925,2.682 U1.57
  Signal Layer 1 w0.2: MOD1.20 -16.51,-6.35 -13.7,-6.35 -10.275,-2.925 -3.575,-2.925 -2.525,-3.975 -1.375,-3.975 -0.5,-3.1 2.525,-3.1 4.125,-1.5 4.125,1.3 v1(4.625,1.8)
A16: MOD1.21 U1.88 | length 30.3
  Top Layer w0.2: v1(-9.325,6.925) -8.725,6.325 -8.325,6.325 U1.88
  Signal Layer 1 w0.2: MOD1.21 -9.185,-10.16 v1(-8.55,-9.525)
  Signal Layer 2 w0.2: v1(-9.325,6.925) -6.7,4.3 -6.7,2.45 -5.575,1.325 -5.575,0.6 -6.6,-0.425 -6.6,-9.625 -6.975,-10 -8.075,-10 v1(-8.55,-9.525)
A17: MOD1.22 U1.73 | length 46.3
  Top Layer w0.2: MOD1.22 -16.52,-8.9 -14.325,-8.9 -13.375,-7.95 v1(-10.875,-7.95) ; U1.73 0.95,10.021 v1(0.95,10.3)
  Signal Layer 1 w0.2: v1(-12.85,11.8) -2.55,11.8 -1.05,10.3 v1(0.95,10.3)
  Signal Layer 2 w0.2: v1(-12.85,11.8) -12.025,10.975 -12.025,9.35 -12.53,8.845 -12.53,5.025 -11.045,3.54 -11.045,-1.13 -9.225,-2.95 -9.225,-6.3 v1(-10.875,-7.95)
A18: MOD1.23 U1.87 | length 30.7
  Top Layer w0.2: v1(-8.35,7.025) -8.318,7.025 U1.87
  Signal Layer 1 w0.2: MOD1.23 -14.175,-12.7 -12.425,-10.95 v1(-12,-10.95)
  Signal Layer 2 w0.2: v1(-12,-10.95) -11.575,-10.525 -6.8,-10.525 -6.125,-9.85 -6.125,-0.725 -5.05,0.35 -5.05,1.525 -6.2,2.675 -6.2,4.875 v1(-8.35,7.025)
A19: MOD1.24 U1.86 | length 36.2
  Top Layer w0.2: v1(-7.95,7.8) -7.7,7.55 -7.7,7.114 U1.86
  Signal Layer 1 w0.2: MOD1.24 -16.505,-13.975 -14.35,-13.975 -12.075,-11.7 v1(-11.425,-11.7)
  Signal Layer 2 w0.2: v1(-11.425,-11.7) -10.75,-11.025 -6.525,-11.025 -5.65,-10.15 -5.65,-1.05 -4.5,0.1 -4.5,1.65 -5.675,2.825 -5.675,5.525 v1(-7.95,7.8)
A20: MOD1.25 U1.22 | length 13.7
  Top Layer w0.2: MOD1.25 -14.915,-15.24 -12.6,-12.925 -9.7,-12.925 -8.25,-11.475 -7.111,-11.475 U1.22
A21: MOD1.26 U1.21 | length 16
  Top Layer w0.2: MOD1.26 -16.515,-13.975 -14.425,-13.975 -12.825,-12.375 -9.975,-12.375 -8.55,-10.95 -7.293,-10.95 U1.21
A22: MOD1.27 U1.2 | length 18.1
  Top Layer w0.2: v1(-12.775,-3.725) -12.775,-2.6 -12.525,-2.35 -12.128,-2.35 U1.2
  Signal Layer 2 w0.2: MOD1.27 -13.975,-16.515 -13.975,-14.3 -12.775,-13.1 v1(-12.775,-3.725)
A23: MOD1.28 U1.71 | length 38.8
  Top Layer w0.2: v1(-0.575,7.475) -0.182,7.475 U1.71
  Signal Layer 1 w0.2: MOD1.28 -12.7,-15 -10.825,-13.125 -9.55,-13.125 -8.05,-11.625 -3.9,-11.625 -0.675,-8.4 v1(3.9,-8.4)
  Signal Layer 2 w0.2: v1(-0.575,7.475) -0.575,5.9 1.725,3.6 1.725,3 3.9,0.825 v1(3.9,-8.4)
BACK#: MOD1.54 U1.95 | length 42.5
  Top Layer w0.2: U1.95 -8.55,1.6 -4.15,1.6 v1(-3.825,1.275)
  Signal Layer 1 w0.2: v1(-0.85,-12.475) -0.675,-12.3 13.775,-12.3 14.625,-11.45 16.53,-11.45 MOD1.54
  Signal Layer 2 w0.2: v1(-3.825,1.275) -3.825,0.1 -5.21,-1.285 -5.21,-8.115 v1(-0.85,-12.475)
BE#: MOD1.45 MOD1.46 U1.28 | length 16.1
  Top Layer w0.2: U1.28 2.329,-11.4 v1(2.75,-11.4) ; MOD1.45 MOD1.46
  Signal Layer 2 w0.2: v1(2.75,-11.4) 5.05,-13.7 5.5,-13.7 6.35,-14.55 6.35,-16.51 MOD1.45
BKLA: MOD1.78 U1.56 | length 15.4
  Top Layer w0.2: U1.56 7.175,4.225 7.175,6.5 6.825,6.85 v1(6.825,8.35)
  Bottom Layer w0.2: v1(6.825,8.35) 7.215,8.74 7.215,9.755 MOD1.78
BREQ#: MOD1.53 U1.1 | length 37.5
  Top Layer w0.2: U1.1 -10.935,-0.45 v1(-9.35,-0.45) ; v1(-2.675,-0.45) -1.85,-1.275 1.15,-1.275 v1(3.25,-3.375)
  Signal Layer 1 w0.2: v1(-9.35,-0.45) v1(-2.675,-0.45) ; v1(3.25,-3.375) 3.775,-2.85 10.6,-2.85 11.025,-3.275 13.225,-3.275 v1(13.45,-3.05)
  Signal Layer 2 w0.2: v1(13.45,-3.05) 13.45,-10.91 MOD1.53
CS0#: MOD1.29 U1.46 | length 32.5
  Top Layer w0.2: U1.46 8.457,-4.8 v1(8.725,-4.8)
  Signal Layer 1 w0.2: MOD1.29 -11.4,-16.48 -11.4,-14.425 -10.6,-13.625 -9.325,-13.625 -7.85,-12.15 -3.625,-12.15 -0.675,-9.2 6.275,-9.2 8.725,-6.75 v1(8.725,-4.8)
CS1#: MOD1.30 U1.47 | length 29.2
  Top Layer w0.2: U1.47 8.414,-4.05 9.025,-4.05 9.525,-4.55 v1(9.525,-5.425)
  Signal Layer 1 w0.2: MOD1.30 -7.595,-12.675 -3.35,-12.675 -0.375,-9.7 6.453,-9.7 9.225,-6.928 9.225,-5.725 v1(9.525,-5.425)
CS2#: MOD1.31 U1.48 | length 32.5
  Top Layer w0.2: U1.48 8.596,-3.525 9.275,-3.525 10.275,-4.525 10.275,-5.95 v1(10.125,-6.1)
  Signal Layer 1 w0.2: MOD1.31 -8.875,-16.495 -8.875,-14.675 -7.375,-13.175 -3.025,-13.175 -0.025,-10.175 6.6,-10.175 10.125,-6.65 v1(10.125,-6.1)
CS3#: MOD1.32 U1.26 | length 14.8
  Top Layer w0.2: U1.26 -0.45,-10.035 -0.45,-11.85 0,-12.3 0.275,-12.3 1.475,-13.5 v1(1.475,-13.7)
  Signal Layer 1 w0.2: MOD1.32 -6.08,-13.7 v1(1.475,-13.7)
D0: MOD1.35 U1.15 | length 15.7
  Top Layer w0.2: U1.15 -6.011,-5.425 -5.5,-5.425 -4.575,-6.35 v1(-4.075,-6.35)
  Bottom Layer w0.2: MOD1.35 -3.8,-16.5 -3.8,-8.1 -4.4,-7.5 -4.4,-6.675 v1(-4.075,-6.35)
D1: MOD1.36 U1.14 | length 14.3
  Top Layer w0.2: U1.14 -7.077,-5.798 -6.179,-4.9 -5.175,-4.9 -4.365,-5.71 -3.29,-5.71 v1(-3.125,-5.875)
  Bottom Layer w0.2: v1(-3.125,-5.875) -2.975,-6.025 -2.975,-14.45 -2.54,-14.885 MOD1.36
D2: MOD1.37 U1.13 | length 19.2
  Top Layer w0.2: U1.13 -6.4,-4.4 -5,-4.4 -4.35,-5.05 v1(-4,-5.05)
  Bottom Layer w0.2: v1(-4,-5.05) -3.9,-5.15 -2.8,-5.15 -2.45,-5.5 -2.45,-13.225 -1.275,-14.4 -1.275,-16.515 MOD1.37
D3: MOD1.38 U1.11 | length 17.9
  Top Layer w0.2: U1.11 -7.314,-3.9 -4.825,-3.9 -4.35,-4.375 -3.15,-4.375 v1(-3.1,-4.425)
  Bottom Layer w0.2: v1(-3.1,-4.425) -2.825,-4.425 -1.975,-5.275 -1.975,-12.975 0,-14.95 MOD1.38
D4: MOD1.39 U1.10 | length 23
  Top Layer w0.2: U1.10 -7.546,-3.425 -4.25,-3.425 v1(-4.025,-3.65)
  Bottom Layer w0.2: v1(-4.025,-3.65) -2.875,-3.65 -1.5,-5.025 -1.5,-12.8 -0.6,-13.7 0.375,-13.7 1.25,-14.575 1.25,-16.53 MOD1.39
D5: MOD1.40 U1.66 | length 23.1
  Top Layer w0.2: v1(1,3.125) 1,5.121 U1.66
  Signal Layer 2 w0.2: v1(1,3.125) 0.825,2.95 0.825,-3 1.025,-3.2 1.025,-12.175 2.54,-13.69 MOD1.40
D6: MOD1.41 U1.65 | length 26.1
  Top Layer w0.2: v1(1.475,2.225) 1.75,2.5 1.75,5.164 U1.65
  Signal Layer 2 w0.2: v1(1.475,2.225) 1.325,2.075 1.325,-2.8 1.525,-3 1.525,-11.925 3.825,-14.225 3.825,-16.495 MOD1.41
D7: MOD1.42 U1.64 | length 22.9
  Top Layer w0.2: v1(2,1.5) 2.225,1.725 2.225,4.932 U1.64
  Signal Layer 2 w0.2: v1(2,1.5) 1.825,1.325 1.825,-2.575 2.05,-2.8 2.05,-11.75 5.08,-14.78 MOD1.42
DBG: MOD1.63 U1.54 | length 11.6
  Top Layer w0.2: v1(5.8,0.675) 5.8,1.436 U1.54
  Signal Layer 1 w0.2: v1(5.8,0.675) 6.475,0 MOD1.63
FCPU: MOD1.100 U1.55 | length 36.4
  Top Layer w0.2: U1.55 7.7,4.043 7.7,6.75 7.525,6.925 v1(7.525,7.6)
  Signal Layer 1 w0.2: v1(-9.925,9.5) -7.95,9.5 -6.4,7.95 -2.775,7.95 -1.375,6.55 6.475,6.55 v1(7.525,7.6)
  Signal Layer 2 w0.2: MOD1.100 -13.96,16.5 -11.925,16.5 -11.425,16 -11.425,14.525 -9.925,13.025 v1(-9.925,9.5)
GND: C1.2 C2.1 C3.2 C4.1 C5.2 C6.2 C7.2 C8.2 C9.2 C10.1 MOD1.8 MOD1.19 MOD1.34 MOD1.44 MOD1.51 MOD1.57 MOD1.61 MOD1.84 MOD1.97 U1.12 U1.16 U1.25 U1.45 U1.51 U1.69 U1.78 U1.84 U1.92 U2.4 | length 86.7
  Top Layer w0.2: v1(-11.65,6.55) -11.378,6.55 U1.92 ; C7.2 -10.575,11.85 -10.575,11.403 -9.997,10.825 -9.275,10.825 -6.725,8.275 -6.725,7.553 U1.84 ; U1.12 -9.157,-6.45 -13,-6.45 C1.2 -12.525,-7.2 -7.079,-7.2 U1.16 ; v1(-5.575,10.875) -5.575,10.646 U1.78 ; C2.1 -4.25,-11.725 -4.25,-10.735 U1.25 ; U1.69 1.338,7.566 1.338,7.594 2.243,8.5 v1(2.275,8.5) ; U1.45 9.7,-6.75 9.7,-7.125 10.1,-7.525 C9.2 ; U1.51 8.139,0.75 v1(8.15,0.75)
  Top Layer w0.3: MOD1.8 -16.525,8.875 -13.925,8.875 -13.075,9.725 C8.2 ; C7.2 -11.425,12.7 -11.425,16.515 MOD1.97
  Top Layer w0.5: MOD1.19 -14.345,-6.725 C1.2 ; C8.2 v1(-12.75,10.625) ; C2.1 -5.08,-12.945 MOD1.34 ; MOD1.84 5.08,12.645 C6.2 5.4,12.475 C10.1@7.35,10.525 ; C3.2 5.725,-13.125 7.62,-15.02 MOD1.44 ; v1(6.575,9.625) 7.35,10.4 C10.1@7.35,10.525 ; C10.1 C10.1@7.35,10.525 ; C9.2 C4.1 15.145,-7.525 MOD1.57 ; C5.2 13.675,-0.975 MOD1.61 ; U2.4@13.175,7.22 U2.4 13.155,8.405 v1(13.5,8.75)
  Signal Layer 2 w0.2: v1(12.025,-10.925) 12.025,-12.4 13.975,-14.35 13.975,-16.515 MOD1.51
  other v1: 7.775,-10.05 -0.725,-7.375 11.8,-5.625 9.25,-2.1
INST#: MOD1.49 U1.27 | length 20.6
  Top Layer w0.2: U1.27 0.275,-10.053 v1(0.275,-11.55)
  Signal Layer 1 w0.2: v1(0.275,-11.55) 1.125,-10.7 9.75,-10.7 v1(10.5,-11.45)
  Signal Layer 2 w0.2: v1(10.5,-11.45) 11.45,-12.4 11.45,-16.53 MOD1.49
MISO: MOD1.94 U1.89 | length 12.9
  Top Layer w0.2: v1(-9.55,8.025) -9.975,7.6 -9.975,6.55 -9.275,5.85 -8.557,5.85 U1.89
  Signal Layer 2 w0.2: v1(-9.55,8.025) -8.7,8.025 -8.175,8.55 -8.175,14.685 MOD1.94
MOSI: MOD1.95 U1.85 | length 13.4
  Top Layer w0.2: v1(-8.9,8.8) -7.95,8.8 -7.225,8.075 -7.225,7.346 U1.85
  Signal Layer 2 w0.2: v1(-8.9,8.8) -8.9,16.5 MOD1.95
NetR1_1: R1.1 U1.52 | length 5.8
  Top Layer w0.2: U1.52 8.178,2.4 8.825,2.4 9.2,2.025 v1(9.2,0.9)
  Bottom Layer w0.2: v1@9.2,1.08 v1(9.2,0.9) 10.575,2.275 R1.1
NetR2_1: R2.1 U1.53 | length 2.9
  Top Layer w0.2: U1.53 v1(8.242,3.171)
  Bottom Layer w0.2: v1(8.242,3.171) 8.242,2.783 R2.1
NetR3_1: R3.1 U1.3 | length 7.3
  Top Layer w0.2: U1.3 -10.246,-1.175 -8.35,-1.175 v1(-6.25,0.925)
  Bottom Layer w0.2: v1(-6.25,0.925) R3.1
NetR4_2: R4.2 U1.100 | length 2.5
  Top Layer w0.2: v1(-12.575,1.15) -12.105,1.62 U1.100
  Bottom Layer w0.2: v1(-12.575,1.15) -12.575,1.95 R4.2
NetR5_2: R5.2 U1.99 | length 3.5
  Top Layer w0.2: U1.99 -10.35,0.572 v1(-10.35,0.4)
  Bottom Layer w0.2: v1(-10.35,0.4) -10.35,2.175 R5.2
NetR6_2: R6.2 U1.98 | length 3.5
  Top Layer w0.2: U1.98 -10.196,1.125 v1(-9.55,1.125)
  Bottom Layer w0.2: v1(-9.55,1.125) -8.4,2.275 R6.2
NMI#: MOD1.52 U1.93 | length 43.8
  Top Layer w0.2: U1.93 -8.086,2.55 -4.6,2.55 -4.275,2.875 -3.65,2.875 -3.15,2.375 v1(-3.15,1.825)
  Signal Layer 1 w0.2: v1(-0.125,-13) 13.6,-13 14.575,-13.975 16.515,-13.975 MOD1.52
  Signal Layer 2 w0.2: v1(-3.15,1.825) -3.15,0.025 -4.77,-1.595 -4.77,-7.805 -0.75,-11.825 -0.475,-11.825 -0.125,-12.175 v1(-0.125,-13)
PB0: MOD1.88 U1.34 | length 24.7
  Top Layer w0.2: v1(-0.65,-4.2) -0.628,-4.2 U1.34
  Signal Layer 2 w0.2: v1(-0.65,-4.2) -0.65,3.925 -2.1,5.375 -2.1,12.55 0,14.65 MOD1.88
PB4: MOD1.92 U1.35 | length 25.7
  Top Layer w0.2: v1(-2.025,-2.775) -1.05,-2.775 0.025,-3.85 0.025,-4.146 U1.35
  Signal Layer 2 w0.2: MOD1.92 -4.875,15.035 -4.875,5.4 -1.65,2.175 -1.65,0.3 -2.025,-0.075 v1(-2.025,-2.775)
PB5: MOD1.93 U1.42 | length 28.1
  Top Layer w0.2: v1(-1.375,-0.475) 1.303,-0.475 U1.42
  Signal Layer 2 w0.2: MOD1.93 -3.8,16.5 -3.8,13.65 -4.35,13.1 -4.35,5.606 -1.15,2.406 -1.15,-0.25 v1(-1.375,-0.475)
PC0: MOD1.76 R6.1 | length 34
  Signal Layer 1 w0.2: v1(5.925,13.6) 6.5,13.025 12.475,13.025 13.975,14.525 13.975,15.825 14.65,16.5 16.52,16.5 MOD1.76
  Bottom Layer w0.2: R6.1 -6.9,5.575 -6.9,7.55 -1.325,13.125 5.45,13.125 v1(5.925,13.6)
PC1: MOD1.77 R3.2 | length 29.8
  Signal Layer 1 w0.2: v1(7.15,13.7) 10.75,13.7 11.475,14.425 11.475,16.05 11.925,16.5 13.96,16.5 MOD1.77
  Bottom Layer w0.2: R3.2 -6.25,7.25 -1.05,12.45 5.9,12.45 v1(7.15,13.7)
PD0: MOD1.68 U1.76 | length 27.2
  Top Layer w0.2: U1.76 -2.15,8.635 -2.15,8.275 -1.5,7.625 v1(-1.5,3.825)
  Signal Layer 1 w0.2: v1(-1.5,3.825) 11.275,3.825 12.225,2.875 12.775,2.875 13.7,3.8 16.5,3.8 MOD1.68
PD1: MOD1.69 U1.77 | length 24.5
  Top Layer w0.2: U1.77 -2.7,8.478 -2.7,7.825 -2.1,7.225 -2.1,4.575 v1(-2.25,4.425)
  Signal Layer 1 w0.2: v1(-2.25,4.425) -2.15,4.525 7.775,4.525 7.875,4.425 11.75,4.425 14.945,7.62 MOD1.69
PD2: MOD1.70 U1.41 | length 24.3
  Top Layer w0.2: U1.41 5.796,-5.675 6.4,-5.675 6.95,-6.225 v1(6.95,-6.35)
  Signal Layer 2 w0.2: v1(12.45,-2.525) 12.45,-0.75 14.475,1.275 16.025,1.275 16.525,1.775 16.525,5.975 17.78,7.23 MOD1.70
  Bottom Layer w0.2: v1(6.95,-6.35) 6.95,-5.336 9.761,-2.525 v1(12.45,-2.525)
PD3: MOD1.71 U1.40 | length 25.3
  Top Layer w0.2: U1.40 5.839,-6.425 v1(6.075,-6.425)
  Signal Layer 2 w0.2: v1(6.075,-6.425) 6.075,-1.625 7.775,0.075 11.775,0.075 13.2,1.5 13.2,7.475 14.2,8.475 14.2,9.12 MOD1.71
PD4: MOD1.72 U1.36 | length 33
  Top Layer w0.2: U1.36 3.5,-6.914 3.5,-7.45 v1(3.25,-7.7)
  Signal Layer 2 w0.2: v1(7.325,-7.175) 7.65,-6.85 7.65,-0.875 8.15,-0.375 12,-0.375 13.75,1.375 13.75,5.575 14.525,6.35 15.975,6.35 16.525,6.9 16.525,8.905 MOD1.72
  Bottom Layer w0.2: v1(3.25,-7.7) 3.25,-8.75 3.65,-9.15 5.6,-9.15 7.325,-7.425 v1(7.325,-7.175)
PD5: MOD1.73 U1.37 | length 31.2
  Top Layer w0.2: U1.37 4.8,-7.507 v1(4.8,-8.475)
  Signal Layer 2 w0.2: v1(4.8,-8.475) 4.8,-8.05 4.35,-7.6 4.35,0.35 7.95,3.95 11.075,3.95 11.975,4.85 11.975,8.475 12.375,8.875 12.375,9.8 13.4,10.825 13.4,11.1 15,12.7 MOD1.73
PD6: MOD1.74 U1.38 | length 32.3
  Top Layer w0.2: U1.38 5.625,-7.625 v1(5.625,-7.975)
  Signal Layer 2 w0.2: v1(5.625,-7.975) 4.85,-7.2 4.85,-1.3 6.775,0.625 6.775,1.15 8.075,2.45 10.3,2.45 12.475,4.625 12.475,8.15 12.85,8.525 12.85,9.653 13.84,10.643 13.84,10.815 14.45,11.425 16.505,11.425 MOD1.74
PD7: MOD1.75 U1.39 | length 34.2
  Top Layer w0.2: U1.39 6.007,-7.3 v1(6.4,-7.3)
  Signal Layer 1 w0.2: v1(12.5,3.65) 13.6,4.75 13.6,5.425 14.525,6.35 15.975,6.35 16.525,6.9 16.525,13.655 15.24,14.94 MOD1.75
  Signal Layer 2 w0.2: v1(6.4,-7.3) 6.007,-7.3 5.325,-6.618 5.325,-1.625 7.375,0.425 7.375,1 8.3,1.925 10.775,1.925 v1(12.5,3.65)
PS2KC: MOD1.83 R2.2 | length 14.4
  Signal Layer 2 w0.2: MOD1.83 8.925,16.475 8.925,14.475 9.2,14.2 v1(9.2,5.275)
  Bottom Layer w0.2: R2.2 9.2,4.675 v1(9.2,5.275)
PS2KD: MOD1.82 R5.1 | length 30.7
  Signal Layer 1 w0.2: v1(-10.925,5.075) -10.919,5.069 7.669,5.069 v1(8.425,5.825)
  Signal Layer 2 w0.2: MOD1.82 7.62,14.855 8.65,13.825 8.65,6.05 v1(8.425,5.825)
  Bottom Layer w0.2: v1(-10.925,5.075) -10.925,4.9 R5.1
PS2MC: MOD1.81 R1.2 | length 14.8
  Signal Layer 2 w0.2: MOD1.81 11.475,16.465 11.475,14.425 10.875,13.825 10.875,5.65 v1(11.325,5.2)
  Bottom Layer w0.2: R1.2 11.325,4.8 v1(11.325,5.2)
PS2MD: MOD1.80 R4.1 | length 31.3
  Signal Layer 1 w0.2: v1(-11.85,5.25) -11.325,5.775 -10.575,5.775 -10.4,5.6 7.1,5.6 10.16,8.66 v1(10.16,8.935)
  Signal Layer 2 w0.2: v1(10.16,8.935) MOD1.80
  Bottom Layer w0.2: R4.1 -11.85,4.625 v1(-11.85,5.25)
RD#: MOD1.47 U1.33 | length 16.5
  Top Layer w0.2: U1.33 5.689,-11.225 8,-11.225 11.45,-14.675 11.45,-16.49 MOD1.47
RST#: MOD1.103 U1.5 | length 40.9
  Top Layer w0.2: U1.5 -9.482,-1.825 0.475,-1.825 v1(2.75,-4.1)
  Signal Layer 1 w0.2: v1(2.75,-4.1) 3.575,-4.1 4.325,-3.35 10.125,-3.35 v1(10.875,-4.1)
  Signal Layer 2 w0.2: v1(10.875,-4.1) 11.6,-4.1 12.75,-5.25 12.75,-12.225 14.5,-13.975 16.1,-13.975 16.5,-14.375 16.5,-16.5 MOD1.103
RTCXI: MOD1.59 U2.1 | length 16
  Top Layer w0.2: U2.1 9.345,6.13 9.925,5.55 9.925,-1.975 13.03,-5.08 MOD1.59
RTCXO: MOD1.58 U2.2 | length 19.6
  Top Layer w0.2: U2.2 10.615,-1.74 12.725,-3.85 15.9,-3.85 16.525,-4.475 16.525,-6.365 MOD1.58
SCL: MOD1.99 U1.75 U2.6 | length 32.1
  Top Layer w0.2: U1.75 -0.45,10.035 -0.45,11.575 v1(-0.525,11.65) ; v1(11.85,11.525) 11.885,11.56 U2.6 U2.6@11.975,12.71
  Signal Layer 1 w0.2: MOD1.99 -11.425,16.505 -11.425,14.3 -9.925,12.8 -1.675,12.8 v1(-0.525,11.65) -0.35,11.825 0.7,11.825 1,11.525 v1(11.85,11.525)
SCLK: MOD1.91 U1.72 | length 11.4
  Top Layer w0.2: MOD1.91 -1.25,16.49 -1.25,14.3 1.59,11.46 1.59,9.954 U1.72
SD#: MOD1.90 U1.81 | length 11.2
  Top Layer w0.2: U1.81 -3.65,6.6 v1(-3.65,6.5)
  Signal Layer 2 w0.2: v1(-3.65,6.5) -3.65,12.95 -2.54,14.06 MOD1.90
SDA: MOD1.98 U1.74 U2.5 | length 31.9
  Top Layer w0.2: U1.74 0.275,10.053 v1(0.275,11.125) ; v1(11.55,10.675) 12.15,10.675 13.155,11.68 U2.5 U2.5@13.15,12.795
  Signal Layer 1 w0.2: MOD1.98 -12.7,14.625 -10.375,12.3 -2.2,12.3 -0.85,10.95 0.1,10.95 v1(0.275,11.125) 0.45,10.95 11.275,10.95 v1(11.55,10.675)
TP#: MOD1.89 U1.80 | length 14
  Top Layer w0.2: U1.80 -3.468,7.125 v1(-2.925,7.125)
  Signal Layer 2 w0.2: v1(-2.925,7.125) -2.925,12.725 -1.25,14.4 -1.25,16.53 MOD1.89
TPIRQ#: MOD1.79 U1.94 | length 37.4
  Top Layer w0.2: U1.94 -8.318,2.075 -4.125,2.075 v1(-3.975,2.225)
  Signal Layer 1 w0.2: v1(-2.8,6.275) -2.6,6.075 6.925,6.075 9.35,8.5 9.35,9.25 9.7,9.6 11.1,9.6 v1(11.55,9.15)
  Signal Layer 2 w0.2: v1(11.55,9.15) 11.55,9.7 12.775,10.925 12.775,13.325 13.975,14.525 13.975,16.505 MOD1.79
  Bottom Layer w0.2: v1(-3.975,2.225) -3.05,3.15 -3.05,6.025 v1(-2.8,6.275)
Vrtc: C10.2 MOD1.60 U2.8 | length 27.5
  Top Layer w0.3: U2.8 9.345,13.35 8.375,13.35 C10.2 10.025,9.95 13.35,9.95 13.925,9.375 14.425,8.875 16.075,8.875 16.525,8.425 16.525,-3.5 17.78,-4.755 MOD1.60
WAIT#: MOD1.50 U1.43 | length 16.5
  Top Layer w0.2: U1.43 8.5,-6.964 8.5,-9.8 9.475,-10.775 10.775,-10.775 MOD1.50
WR#: MOD1.48 U1.32 | length 15
  Top Layer w0.2: U1.32 4.775,-11.018 v1(4.775,-11.375) ; v1(9.35,-11.55) 12.7,-14.9 MOD1.48
  Signal Layer 1 w0.2: v1(4.775,-11.375) 4.95,-11.55 v1(9.35,-11.55)
XIN: MOD1.85 U1.24 | length 33.8
  Top Layer w0.2: U1.24 -2.5,-8.278 -2.5,-7.5 -1.225,-6.225 v1(-0.775,-6.225)
  Signal Layer 2 w0.2: v1(-0.775,-6.225) 0.475,-4.975 0.475,-3.4 0.325,-3.25 0.325,4.3 -1.215,5.84 -1.215,11.935 0.1,13.25 2.625,13.25 3.825,14.45 3.825,16.525 MOD1.85
XOUT: MOD1.86 U1.23 | length 29.3
  Top Layer w0.2: U1.23 -2.975,-8.046 -2.975,-6.975 -1.15,-5.15 v1(-0.837,-5.15)
  Signal Layer 2 w0.2: v1(-0.837,-5.15) -0.525,-5.15 0,-4.625 0,-3.65 -0.15,-3.5 -0.15,4.1 -1.655,5.605 -1.655,12.22 -0.05,13.825 1.125,13.825 MOD1.86
pads on no net: MOD1.62 MOD1.64 MOD1.65 MOD1.66 MOD1.101 MOD1.102 MOD1.104 U1.0 U1.29 U1.49 U1.82 U1.83 U1.97 U2.3 U2.7

## Polygon pours and split planes (outlines as drawn)
GND on Signal Layer 2 "GND_L03_P002" (solid, remove dead copper, pour order 2): -18.5,-18.5 18.5,-18.5 18.5,18.5 -17.5,18.5 -18.5,17.5
GND on Signal Layer 1 "GND_L02_P000" (solid, remove dead copper, pour order 0): -18.5,-18.5 18.5,-18.5 18.5,18.5 -17.5,18.5 -18.5,17.5
GND on Bottom Layer "GND_L04_P004" (solid, remove dead copper, pour order 4): -18.5,-18.5 18.5,-18.5 18.5,18.5 -17.5,18.5 -18.5,17.5

## Silkscreen, mask and mechanical layers (free items; w line width, h text height)
Top Overlay:
  rectangle: -13.589,12.314 -12.339,13.589
  text "ZNEO-Z20X" at -7.175,12.625 h2
Bottom Overlay:
  text "(C) KnivD, 2020" at 13.45,12.275 h2
  text "Z20X CPU" at 11,9.85 h2
  text "HEADERS ON THIS SIDE" at 10.6,-0.65 h2